# Altium PCB PCB1.PcbDoc
Units mil, origin at the board's own origin, x right, y up, seen from the top; angles counter-clockwise.
Board outline 5050 x 2000 mil, 2 copper layers (Top Layer, Bottom Layer); 20 components, 20 nets, 111 pads, 0 vias.
Unrouted connection lines stored in the file: 40.
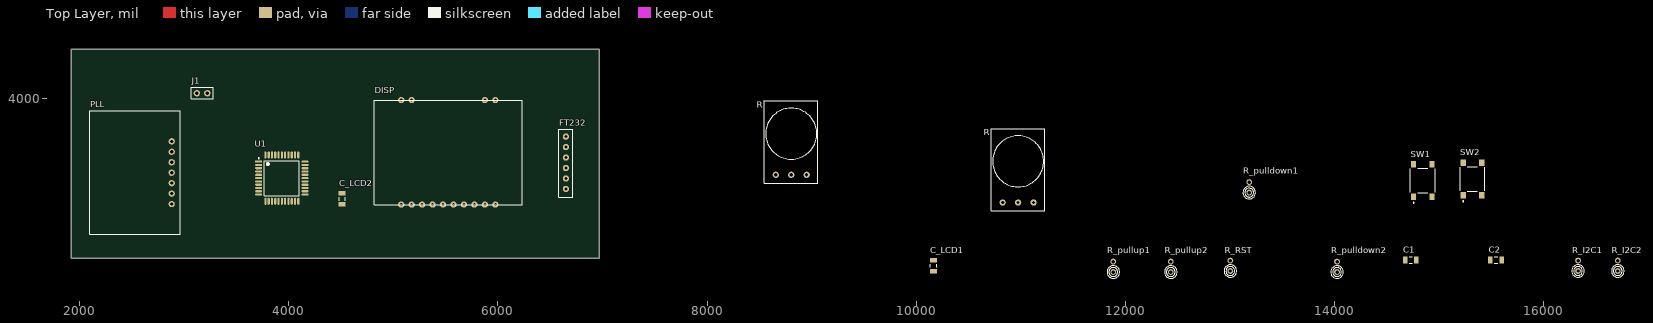
[diagram p0: Top Layer view]
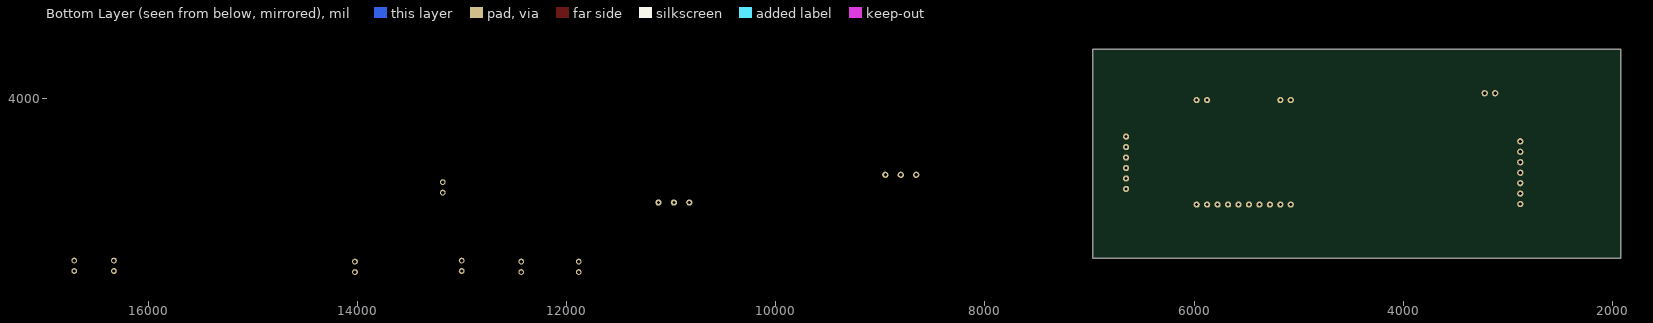
[diagram p1: Bottom Layer view, seen from below]

## Layer stack, top to bottom
Top Solder: solder mask 0.4, Solder Resist, Dk 3.5
Top Layer: signal copper 1.4
Dielectric 1: dielectric 12.6, FR-4, Dk 4.8
Bottom Layer: signal copper 1.4
Bottom Solder: solder mask 0.4, Solder Resist, Dk 3.5

## Board outline
1920,4470 6970,4470 6970,2470 1920,2470

## Design rules (kind name [scope] priority, off if disabled: settings)
Clearance [All] p1: gap=10 ignorepadtopadclearanceinfootprint=FALSE
PolygonConnect [All] p1: connectstyle=Relief reliefconductorwidth=10 reliefentries=4 polygonreliefangle="90 Angle" airgapwidth=10
RoutingVias [All] p1: holewidth=28 width=50 viastyle="Through Hole" minholewidth=28 minwidth=50 maxholewidth=28 maxwidth=50
SolderMaskExpansion [All] p1: expansion=4 istentingtop=FALSE
SupplyNets "Schematic Supply Nets_1" [InNet('GND')] p1: voltage=0.000
SupplyNets "Schematic Supply Nets" [InNet('VCC')] p2: voltage=0.000
Width [All] p1: maxlimit=10 minlimit=10 preferedwidth=10
30 further rules are at their usual default settings.

## Components (designator, comment, footprint, x,y, rotation, side; value= is the part's Value field where it differs from the comment)
C1 "Cap" 1206 14730,2455 r0 top value=0.1UF
C2 "Cap" 1206 15545,2455 r0 top value=0.1UF
C_LCD1 "Cap" 1206 10165,2400 r90 top value=1UF
C_LCD2 "Cap" 1206 4510,3040 r90 top value=1UF
DISP "EA_DOGS104N-A" LCD 5975,2985 r180 top
FT232 "FT232" FT232 6650,3635 r0 top
J1 "power header" "power header" 3120,4050 r0 top
PLL "Si5351A" Si5351A 2530,3290 r90 top
R "P120PK-Y25BR10K" potentiometer 10827.36,3005 r0 top
R "P120PK-Y25BR10K" potentiometer 8657.36,3270 r0 top
R_I2C1 "Res1" AXIAL-0.1-RES 16330,2400 r90 top value=10K
R_I2C2 "Res1" AXIAL-0.1-RES 16710,2400 r90 top value=10K
R_pulldown1 "" AXIAL-0.1-RES 13185,3150 r90 top value=10K
R_pulldown2 "" AXIAL-0.1-RES 14025,2390 r90 top value=10K
R_pullup1 "Res1" AXIAL-0.1-RES 11885,2390 r90 top value=10K
R_pullup2 "Res1" AXIAL-0.1-RES 12435,2390 r90 top value=10K
R_RST "Res1" AXIAL-0.1-RES 13005,2400 r90 top value=10K
SW1 "PTS645SM43SMTR92LFS" FP-PTS645SM43SMTR92LFS-MFG 14845,3215 r90 top
SW2 "PTS645SM43SMTR92LFS" FP-PTS645SM43SMTR92LFS-MFG 15320,3230 r90 top
U1 "ATMEGA324PB-AN" FP-44A-IPC_B 3933.5,3238.53 r0 top

## Footprints (in the part's own frame and the unit in brackets; to place one, negate y for a bottom-side part, rotate by r counter-clockwise, add the part's x,y. Pads: shape width x height; smd on the part's side, far side on the other; paste and mask are expansions set on the pad)
1206 [mm] "Chip Capacitor, Body 3.2x1.6mm, IPC High Density"
  rect 1.1x1.7 smd: 1(-1.35,0) 2(1.35,0)
  silkscreen extent -0.4,-0.75 0.4,0.75, body extent -1.7,-0.9 1.7,0.9, height 1.3
AXIAL-0.1-RES [mm] "Axial Device, Thru-Hole; 2 Leads; 0.3 in Pin Spacing"
  round 1.4 hole 0.85: 1(-1.27,0) 2(1.27,0)
  silkscreen extent -2.8,-1.53 0.26,1.53
FP-44A-IPC_B [mm]
  rect 1.704x0.526 smd paste+0 mask+0: 1(-5.625,4)
  rrect100% 1.704x0.526 smd paste+0 mask+0: 2(-5.625,3.2) 3(-5.625,2.4) 4(-5.625,1.6) 5(-5.625,0.8) 6(-5.625,0) 7(-5.625,-0.8) 8(-5.625,-1.6) 9(-5.625,-2.4) 10(-5.625,-3.2) 11(-5.625,-4) 23(5.625,-4) 24(5.625,-3.2) 25(5.625,-2.4) 26(5.625,-1.6) 27(5.625,-0.8) 28(5.625,0) 29(5.625,0.8) 30(5.625,1.6) 31(5.625,2.4) 32(5.625,3.2) 33(5.625,4)
  rrect100% 0.526x1.704 smd paste+0 mask+0: 12(-4,-5.625) 13(-3.2,-5.625) 14(-2.4,-5.625) 15(-1.6,-5.625) 16(-0.8,-5.625) 17(0,-5.625) 18(0.8,-5.625) 19(1.6,-5.625) 20(2.4,-5.625) 21(3.2,-5.625) 22(4,-5.625) 34(4,5.625) 35(3.2,5.625) 36(2.4,5.625) 37(1.6,5.625) 38(0.8,5.625) 39(0,5.625) 40(-0.8,5.625) 41(-1.6,5.625) 42(-2.4,5.625) 43(-3.2,5.625) 44(-4,5.625)
  silkscreen extent -5.75,-4.25 4.25,4.92, body extent -6.73,-6.73 6.73,6.73, height 0.25
FP-PTS645SM43SMTR92LFS-MFG [mm]
  rect 1.55x1.3 smd paste+0 mask+0: 1(-3.975,2.25) 2(3.975,2.25) 3(-3.975,-2.25) 4(3.975,-2.25)
  silkscreen extent -5.52,-3 3,3, body extent -4.85,-3.1 4.85,3.1, height 0.25
FT232 [mil] "FT232"
  round 60 hole 30: CTS(0,-100) GND(0,0) RTS(0,-500) RX(0,-400) TX(0,-300) VCC(0,-200)
  silkscreen extent -70,-580 65,70
LCD [mil] "lcd display"
  round 60 hole 30: 11(900,0) 12(800,0) 13(700,0) 14(600,0) 15(500,0) 16(400,0) 17(300,0) 18(200,0) 19(100,0) 20(0,0) A1(0,-1000) A2(900,-1000) C1(100,-1000) C2(800,-1000) ""(800,0) ""(800,0)
  silkscreen extent -259,-1000 1159,0
potentiometer [mil] "potentiometer for knobs(PN: P120PK-Y25BR10K)"
  round 60 hole 30: 1(0,0) 2(147.64,0) 3(295.28,0)
  silkscreen extent -108,-80 404,707
"power header" [mil] "power header"
  round 60 hole 30: GND(100,0) VCC(0,0)
  silkscreen extent -55,-55 155,55
Si5351A [mil] "PLL"
  round 60 hole 30: 0(-300,-350) 1(-200,-350) 2(-100,-350) GND(200,-350) SCL(0,-350) SDA(100,-350) VIN(300,-350)
  silkscreen extent -591,-433 591,433

## Part data
C1 C2: library part "CAP CER 0.1UF 50V X7R 1206", "Capacitor", Manufacturer Part Number=885012208087, Voltage Rating=50V, LatestRevisionDate=17-Jul-2002, LatestRevisionNote="Re-released for DXP Platform.", Published=8-Jun-2000, Publisher="Altium Limited"
C_LCD1 C_LCD2: library part "CAP CER 1UF 50V X7R 1206", "Capacitor", Manufacturer Part Number=885012208093, Voltage Rating=50V, LatestRevisionDate=17-Jul-2002, LatestRevisionNote="Re-released for DXP Platform.", Published=8-Jun-2000, Publisher="Altium Limited"
DISP: "LCD display"
PLL: "PLL"
R R: "potentiometer"
R_I2C1 R_I2C2 R_pulldown1 R_pulldown2 R_pullup1 R_pullup2 R_RST: library part "RES 10K OHM 5% 1/4W AXIAL", "Resistor", Manufacturer Part Number=CFR-25JB-52-10K, Power Rating=1/4W, Tolerance=0.05, LatestRevisionDate=17-Jul-2002, LatestRevisionNote="Re-released for DXP Platform.", Published=8-Jun-2000, Publisher="Altium Limited"
SW1 SW2: library part CMP-2000-05160-2, "SWITCH TACTILE SPST-NO 0.05A 12V", Case/Package=SMD/SMT, Color=Black, Contact Resistance=100mR, Current Rating=50mA, Max Operating Temperature=60°C, Max Voltage Rating (DC)=12V, Min Operating Temperature=-20°C, Operating Force=160gf, Package Quantity=1, Actuator Length=0.85mm, Actuator Material=Nylon, Actuator Type=Standard, Contact Material=Silver, Contact Plating=Silver, Depth=9mm, Illumination Type=Non-Illuminated, Lead Free="Lead Free", Length=6mm, Max Current Rating=50mA, Mechanical Life=100000Cycles, Mount="Surface Mount", Orientation=Straight, Packaging="Tape and Reel", REACH SVHC="No SVHC", Switch Function=Off-Mom, Termination="Gull Wing", Throw Configuration=SPST, Voltage Rating (DC)=12V
U1: library part CMP-06276-000172-1, "IC MCU 8BIT 32KB FLASH 44TQFP", Case/Package=TQFP, Frequency=20MHz, Max Operating Temperature=105°C, Min Operating Temperature=-40°C, Core Architecture=AVR, Interface=I2C, Memory Size=32KB, Memory Type=FLASH, Number of I/Os=39, Oscillator Type=Internal, Packaging=Tray, Peripherals="Brown-out Detect/Reset", RoHS Compliant=Yes

## Nets (pads, with @x,y where several pads share a name; then routed paths per layer and width w, separated by ;. In a path a pad name is that pad's centre, name@x,y a point inside that pad or via, vN(x,y) a via of type N, cw(c..) or ccw(c..) an arc to the next point about the centre after c; other vN are vias at no path point)
BUTTON_OUTPUT1: R_pulldown1.2 SW1.2 U1.37
BUTTON_OUTPUT2: R_pulldown2.2 SW2.2 U1.36
CTS: U1.11
DISP_RST: DISP.20 U1.40
FT232_RST: U1.41
GND: C1.1 C2.1 C_LCD1.2 C_LCD2.1 DISP.12 DISP.14 DISP.18 DISP.19 R.3 R_pulldown1.1 R_pulldown2.1 U1.6 U1.28
JTAG_RST: R_RST.2 U1.4
MCU_RX0: U1.9
MCU_TX0: U1.10
NetC_LCD1_1: C_LCD1.1 DISP.11
NetR_1: R.1@8657.36,3270 R_pullup1.1
SCL: DISP.17 R_I2C2.1 U1.19
SDA: DISP.15 DISP.16 R_I2C1.1 U1.20
TCK: U1.21
TDI: U1.24
TDO: U1.23
TMS: U1.22
VCC: C1.2 C2.2 C_LCD2.2 DISP.13 R_I2C1.2 R_I2C2.2 R_pullup1.2 R_pullup2.2 R_RST.1 SW1.3 SW2.3 U1.5 U1.27
Vfreq1: R.2@8805,3270 U1.35
Vfreq2: R.2@10975,3005 U1.34
pads on no net: DISP. DISP.A1 DISP.A2 DISP.C1 DISP.C2 FT232.CTS FT232.GND FT232.RTS FT232.RX FT232.TX FT232.VCC J1.GND J1.VCC PLL.0 PLL.1 PLL.2 PLL.GND PLL.SCL PLL.SDA PLL.VIN R.1@10827.36,3005 R_pullup2.1 SW1.1 SW1.4 SW2.1 SW2.4 U1.1 U1.2 U1.3 U1.7 U1.8 U1.12 U1.13 U1.14 U1.15 U1.16 U1.17 U1.18 U1.25 U1.26 U1.29 U1.30 U1.31 U1.32 U1.33 U1.38 U1.39 U1.42 U1.43 U1.44